# Altium PCB PCB1.PcbDoc
Units mm, origin at the board's own origin, x right, y up, seen from the top; angles counter-clockwise.
Board outline 116.2 x 78.99 mm, 2 copper layers (Top Layer, Bottom Layer); 25 components, 23 nets, 119 pads, 24 vias.
Unrouted connection lines stored in the file: 1.
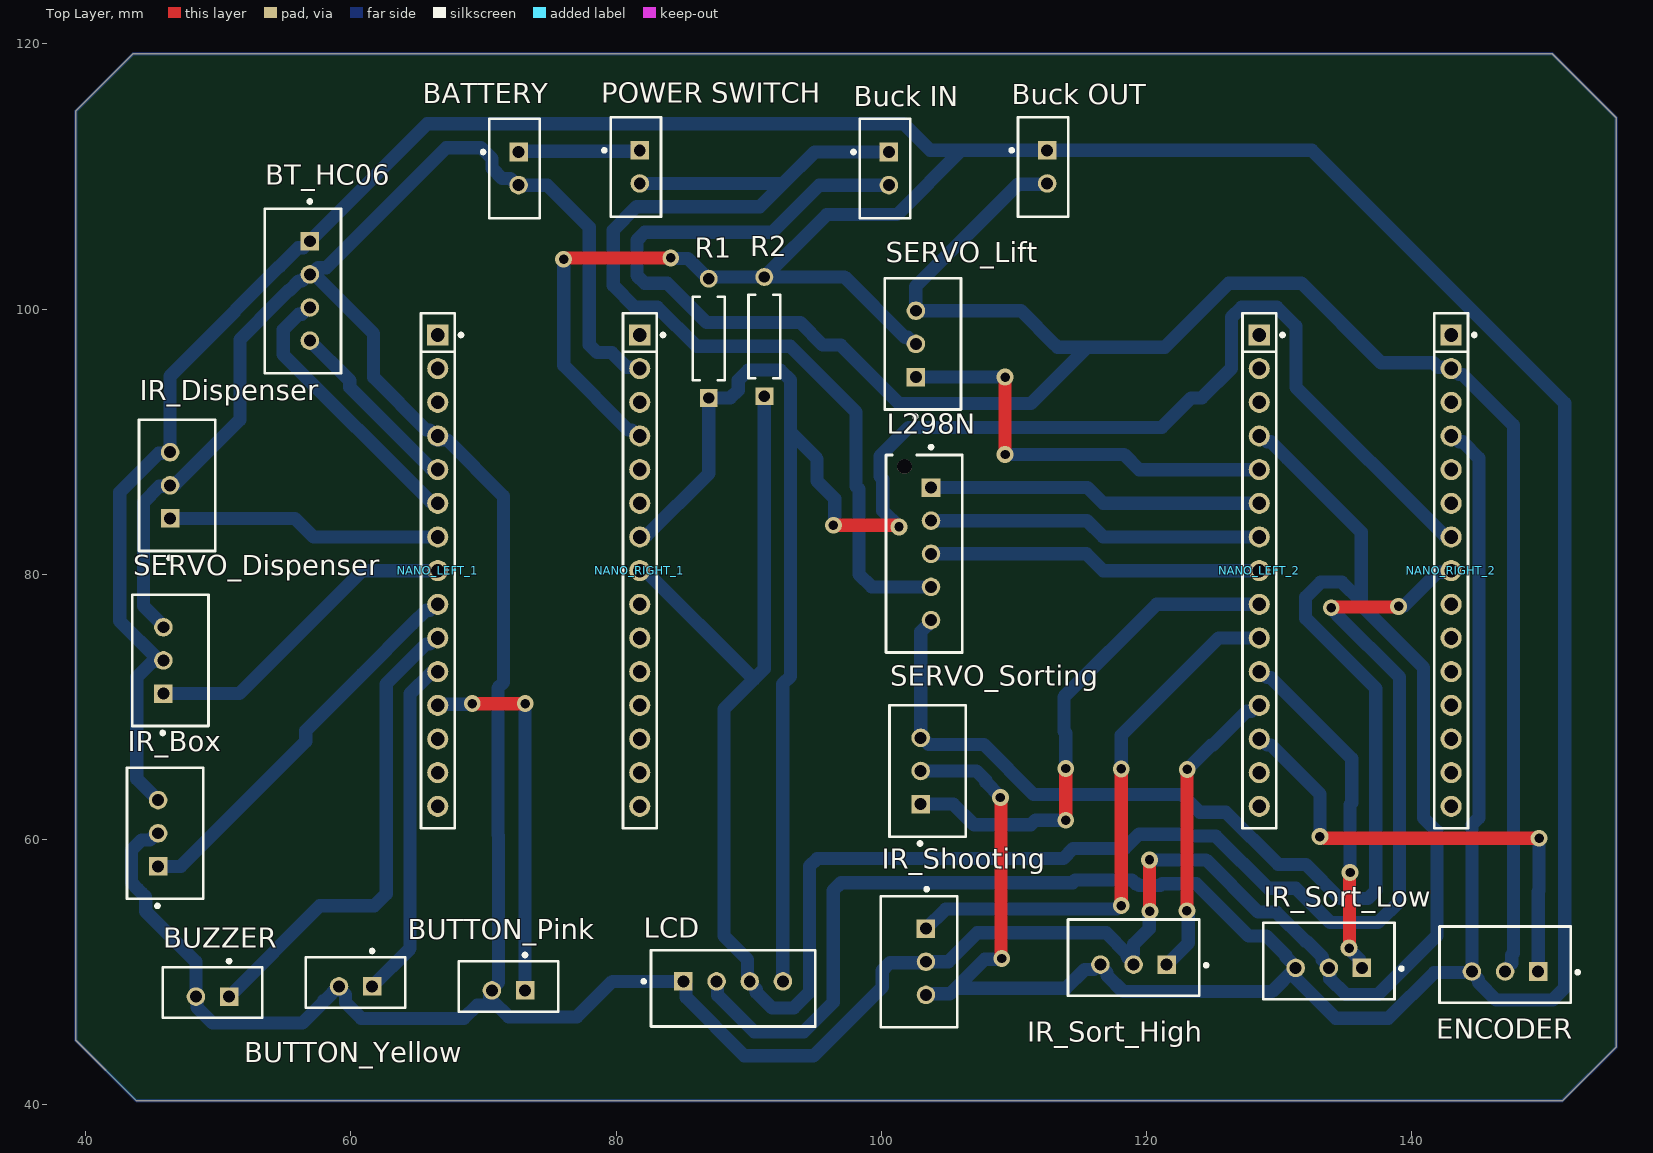
[diagram p0: Top Layer view]
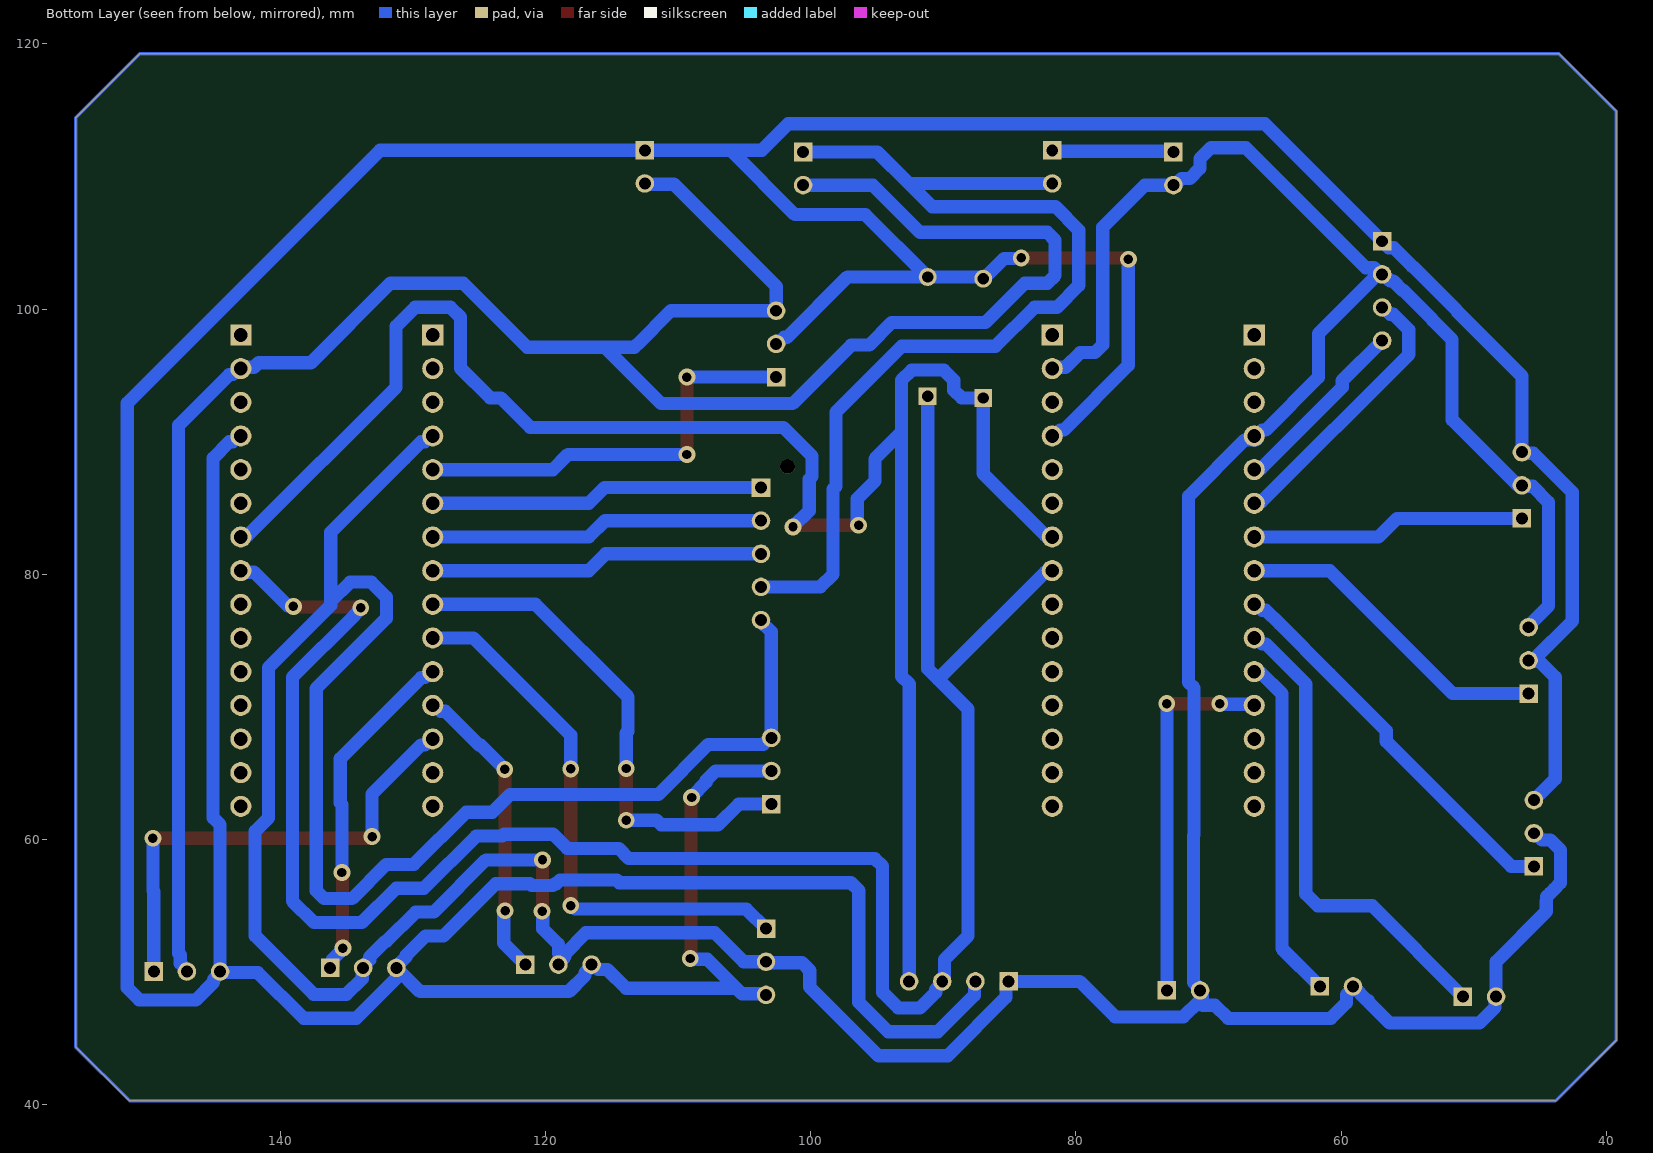
[diagram p1: Bottom Layer view, seen from below]
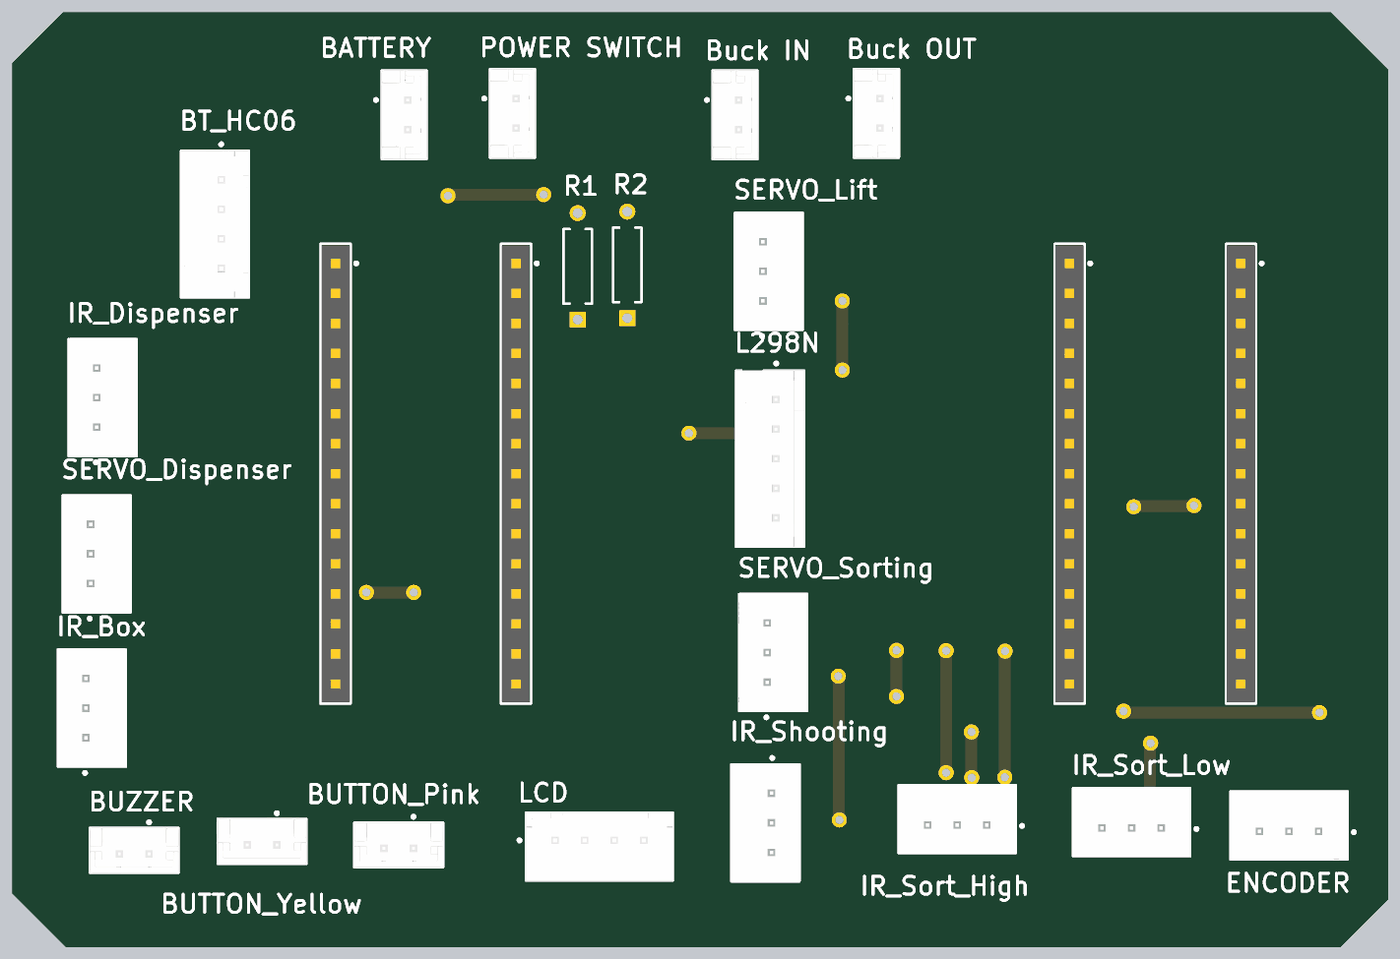
[diagram p2: 3D render of the assembled board from above, using the file's embedded part models]

## Layer stack, top to bottom
Top Solder: solder mask 0.0102, Solder Resist, Dk 3.5
Top Layer: signal copper 0.0356
Dielectric 1: dielectric 0.32, FR-4, Dk 4.8
Bottom Layer: signal copper 0.0356
Bottom Solder: solder mask 0.0102, Solder Resist, Dk 3.5

## Board outline
39.243,44.831 39.243,114.935 43.561,119.253 150.622,119.253 155.448,114.427 155.448,44.323 151.384,40.259 43.815,40.259

## Design rules (kind name [scope] priority, off if disabled: settings)
Clearance [All] p1: gap=0.8 ignorepadtopadclearanceinfootprint=FALSE
PolygonConnect [All] p1: connectstyle=Relief reliefconductorwidth=0.254 reliefentries=4 polygonreliefangle="90 Angle" airgapwidth=0.254
RoutingVias [All] p1: holewidth=0.711 width=1.27 viastyle="Through Hole" minholewidth=0.711 minwidth=1.27 maxholewidth=0.711 maxwidth=1.27
SolderMaskExpansion [All] p1: expansion=0 istentingtop=FALSE
SupplyNets "Schematic Supply Nets_3" [InNet('+5V')] p1: voltage=0.000
SupplyNets "Schematic Supply Nets_1" [InNet('+12V')] p2: voltage=0.000
SupplyNets "Schematic Supply Nets" [InNet('GND')] p3: voltage=0.000
Width [All] p1: maxlimit=1.2 minlimit=0.254 preferedwidth=1 minimp=50.000000 maximp=50.000000 favimp=50.000000
30 further rules are at their usual default settings.

## Components (designator, comment, footprint, x,y, rotation, side; value= is the part's Value field where it differs from the comment)
BATTERY "B2B-EH-A(LF)(SN)" FP-B2B-EH-A_LF_SN-MFG 72.344,110.597 r270 top
BT_HC06 "B4B-XH-A(LF)(SN)" FP-B4B-XH-A_LF_SN-MFG 56.371,101.366 r90 top
"Buck IN" "B2B-EH-A(LF)(SN)" FP-B2B-EH-A_LF_SN-MFG 100.284,110.597 r270 top
"Buck OUT" "B2B-EH-A(LF)(SN)" FP-B2B-EH-A_LF_SN-MFG 112.222,110.724 r270 top
BUTTON_Pink "B2B-EH-A(LF)(SN)" FP-B2B-EH-A_LF_SN-MFG 71.882,48.895 r180 top
BUTTON_Yellow "B2B-EH-A(LF)(SN)" FP-B2B-EH-A_LF_SN-MFG 60.345,49.195 r180 top
BUZZER "B2B-EH-A(LF)(SN)" FP-B2B-EH-A_LF_SN-MFG 49.55,48.433 r180 top
ENCODER "B3B-XH-A(LF)(SN)" FP-B3B-XH-A_LF_SN-MFG 147.066,50.546 r180 top
IR_Box "B3B-XH-A(LF)(SN)" FP-B3B-XH-A_LF_SN-MFG 45.974,60.452 r90 top
IR_Dispenser "B3B-XH-A(LF)(SN)" FP-B3B-XH-A_LF_SN-MFG 46.88,86.701 r90 top
IR_Shooting "B3B-XH-A(LF)(SN)" FP-B3B-XH-A_LF_SN-MFG 102.853,50.76 r270 top
IR_Sort_High "B3B-XH-A(LF)(SN)" FP-B3B-XH-A_LF_SN-MFG 119.039,51.071 r180 top
IR_Sort_Low "B3B-XH-A(LF)(SN)" FP-B3B-XH-A_LF_SN-MFG 133.771,50.817 r180 top
L298N "B5B-XH-AM(LF)(SN)" FP-B5B-XH-AM_LF_SN-MFG 103.234,81.534 r90 top
LCD "B4B-XH-A(LF)(SN)" FP-B4B-XH-A_LF_SN-MFG 88.833,48.751 r180 top
NANO_LEFT_1 "SSW-115-01-T-S" FP-SSW-115-01-T-S-MFG 66.548,80.264 r270 top
NANO_LEFT_2 "SSW-115-01-T-S" FP-SSW-115-01-T-S-MFG 128.524,80.264 r270 top
NANO_RIGHT_1 "SSW-115-01-T-S" FP-SSW-115-01-T-S-MFG 81.788,80.264 r270 top
NANO_RIGHT_2 "SSW-115-01-T-S" FP-SSW-115-01-T-S-MFG 143.002,80.264 r270 top
"POWER SWITCH" "B2B-EH-A(LF)(SN)" FP-B2B-EH-A_LF_SN-MFG 81.488,110.724 r270 top
R1 "MFR-25FBF52-4K75" RESA60-630X240 86.995,97.79 r90 top value=4.7k
R2 "MFR-25FBF52-4K75" RESA60-630X240 91.186,97.917 r90 top value=4.7k
SERVO_Dispenser "B3B-XH-A(LF)(SN)" FP-B3B-XH-A_LF_SN-MFG 46.372,73.493 r90 top
SERVO_Lift "B3B-XH-A(LF)(SN)" FP-B3B-XH-A_LF_SN-MFG 103.141,97.369 r90 top
SERVO_Sorting "B3B-XH-A(LF)(SN)" FP-B3B-XH-A_LF_SN-MFG 103.505,65.151 r90 top

## Footprints (in the part's own frame and the unit in brackets; to place one, negate y for a bottom-side part, rotate by r counter-clockwise, add the part's x,y. Pads: shape width x height; smd on the part's side, far side on the other; paste and mask are expansions set on the pad)
FP-B2B-EH-A_LF_SN-MFG [mm]
  rect 1.4x1.4 hole 0.9 paste-2539.97 mask+0: 1(-1.25,0.3)
  round 1.4 hole 0.9 paste-2539.97 mask+0: 2(1.25,0.3)
  silkscreen extent -3.75,-2.5 3.75,1.9, body extent -3.85,-2 3.85,2, height 0.25
FP-B3B-XH-A_LF_SN-MFG [mm]
  rect 1.4x1.4 hole 0.9 paste-2539.97 mask+0: 1(-2.5,0.525)
  round 1.4 hole 0.9 paste-2539.97 mask+0: 2(0,0.525) 3(2.5,0.525)
  silkscreen extent -5.6,-2.88 4.95,2.88, body extent -5.05,-2.98 5.05,2.98, height 0.25
FP-B4B-XH-A_LF_SN-MFG [mm]
  rect 1.4x1.4 hole 0.9 paste-2539.97 mask+0: 1(3.75,-0.525)
  round 1.4 hole 0.9 paste-2539.97 mask+0: 2(1.25,-0.525) 3(-1.25,-0.525) 4(-3.75,-0.525)
  silkscreen extent -6.2,-2.88 6.87,2.88, body extent -6.3,-2.98 6.3,2.98, height 0.25
FP-B5B-XH-AM_LF_SN-MFG [mm]
  rect 1.4x1.4 hole 0.9 paste-2539.97 mask+0: 1(5,-0.525)
  round 1.4 hole 0.9 paste-2539.97 mask+0: 2(2.5,-0.525) 3(0,-0.525) 4(-2.5,-0.525) 5(-5,-0.525)
  round 1.1 hole 1.1 unplated paste-2539.97 mask+0: ""(6.6,1.475)
  silkscreen extent -7.45,-2.88 8.17,2.88, body extent -7.55,-2.98 7.55,2.98, height 0.25
FP-SSW-115-01-T-S-MFG [mm]
  rect 1.59x1.59 hole 1.04 paste-2539.97 mask+0: 1(-17.78,0)
  round 1.59 hole 1.04 paste-2539.97 mask+0: 2(-15.24,0) 3(-12.7,0) 4(-10.16,0) 5(-7.62,0) 6(-5.08,0) 7(-2.54,0) 8(0,0) 9(2.54,0) 10(5.08,0) 11(7.62,0) 12(10.16,0) 13(12.7,0) 14(15.24,0) 15(17.78,0)
  silkscreen extent -19.43,-1.27 19.43,1.88, body extent -19.3,-1.21 19.3,1.21, height 8.64
RESA60-630X240 [mm] "Axial Resistor, 2-Leads, Dia 2.4mm, Body Length 6.3mm"
  rect 1.35x1.35 hole 0.85: 1(-4.5,0)
  round 1.35 hole 0.85: 2(4.5,0)
  silkscreen extent -3.15,-1.2 3.15,1.2, body extent -4.77,-1.19 4.77,1.2, height 2.4

## Part data
BATTERY "Buck IN" "Buck OUT" BUTTON_Pink BUTTON_Yellow BUZZER "POWER SWITCH": library part CMP-17439-000026-1, "CONN HEADER VERT 2POS 2.5MM", Color=Natural, Contact Resistance=20mR, Current Rating=3A, Housing Color=White, Max Operating Temperature=85°C, Max Voltage Rating (AC)=250V, Min Operating Temperature=-25°C, Connector Type=Plug, Contact Material="Copper Alloy", Contact Mating Length=0.13inch, Contact Plating=Tin, Contact Type="Male Pin", Depth=3.8mm, Fastening Type=Detent, Gender=Male, Housing Material=Nylon, Lead Free="Lead Free", Length=7.5mm, Max Current Rating=3A, Mount="Through Hole", Number of Contacts=2, Number of Positions=2, Number of Rows=1, Orientation=Straight, Packaging=Bulk, Pitch=2.5mm, Series=EH, Termination=Press-Fit, Voltage Rating=250V
BT_HC06 LCD: library part CMP-17439-000250-1, "CONN HEADER VERT 4POS 2.5MM", Color=Natural, Contact Resistance=20mR, Current Rating=3A, Flammability Rating="UL94 V-0", Housing Color=White, Insulation Resistance=1GR, Max Operating Temperature=85°C, Max Voltage Rating (AC)=250V, Min Operating Temperature=-25°C, Package Quantity=500, Connector Type=Header, Contact Finish - Mating=TIN, Contact Material=Brass, Contact Plating=Tin, Contact Shape=Square, Contact Type="Male Pin", Depth=5.75mm, Fastening Type=Detent, Gender=Male, Housing Material=Polyamide, Insulation Color=Natural, Insulation Material=Nylon, Lead Free="Lead Free", Lead Pitch=2.5mm, Length=12.4mm, Mated Stacking Heights=9.8mm, Material=Polyamide, Max Current Rating=3A, Max Voltage Rating (DC)=250V, Mount="Through Hole", Number of Contacts=4, Number of Positions=4, Number of Rows=1, Orientation=Straight, Packaging=Bulk, Pitch=2.5mm, REACH SVHC="No SVHC", Series=XH, Termination=Solder, Voltage Rating=250V, Voltage Rating (AC)=250V, Wire/Cable Gauge=22AWG
ENCODER IR_Box IR_Dispenser IR_Shooting IR_Sort_High IR_Sort_Low SERVO_Dispenser SERVO_Lift SERVO_Sorting: library part CMP-17439-000014-3, "CONN HEADER VERT 3POS 2.5MM", Color=Natural, Contact Resistance=20mR, Current Rating=3A, Flammability Rating="UL94 V-0", Housing Color=White, Insulation Resistance=1GR, Max Operating Temperature=85°C, Max Voltage Rating (AC)=250V, Min Operating Temperature=-25°C, Connector Type=Header, Contact Finish - Mating=TIN, Contact Material=Brass, Contact Plating=Tin, Contact Shape=Square, Contact Type="Male Pin", Depth=5.75mm, Fastening Type=Detent, Gender=Male, Housing Material=Polyamide, Insulation Color=Natural, Insulation Material=Nylon, Lead Free="Lead Free", Lead Pitch=2.5mm, Length=9.9mm, Max Current Rating=3A, Max Voltage Rating (DC)=250V, Mount="Through Hole", Number of Contacts=3, Number of Positions=3, Number of Rows=1, Orientation=Straight, Packaging=Bulk, Pitch=2.5mm, REACH SVHC="No SVHC", Series=XH, Termination=Solder, Voltage Rating=250V, Voltage Rating (AC)=250V, Wire/Cable Gauge=22AWG
L298N: library part CMP-17439-000304-1, "CONN HEADER VERT 5POS 2.5MM", Color=Green, Contact Resistance=20mR, Flammability Rating="UL94 V-0", Housing Color=White, Insulation Color=Natural, Max Current Rating=3A, Max Operating Temperature=85°C, Max Voltage Rating (AC)=250V, Min Operating Temperature=-25°C, Connector Type=Header, Contact Finish - Mating=TIN, Contact Material=Brass, Contact Plating=Copper, Contact Shape=Square, Contact Type="Male Pin", Depth=5.75mm, Fastening Type=Detent, Housing Material=Polyamide, Insulation Material=Nylon, Lead Free="Lead Free", Length=14.9mm, Mated Stacking Heights=9.8mm, Mount="Through Hole", Number of Positions=5, Number of Rows=1, Orientation=Straight, Packaging=Bulk, Pitch=2.5mm, Series=XH, Termination=Solder, Voltage Rating=250V
NANO_LEFT_1 NANO_LEFT_2 NANO_RIGHT_1 NANO_RIGHT_2: library part CMP-02766-001723-1, "CONN RCPT 15POS 0.1 TIN PCB", Color=Black, Contact Resistance=10mR, Max Current Rating=6.9A, Max Operating Temperature=105°C, Max Voltage Rating (AC)=550V, Min Operating Temperature=-55°C, Connector Type=Receptacle, Contact Material=Bronze, Contact Plating=Tin, Contact Type="Female Socket", Depth=2.41mm, Gender=Receptacle, Housing Color=Black, Housing Material=Polymer, Lead Free="Lead Free", Length=38.61mm, Mating Cycles=100, Mount="Through Hole", Number of Contacts=15, Number of Positions=15, Number of Rows=1, Orientation=Straight, Packaging=Bulk, Pitch=0.1inch, Radiation Hardening=No, REACH SVHC="No SVHC", RoHS Compliant=Yes, Series=SSW, Termination=Solder, Width=2.41mm
R1 R2: library part CMP-009-00059-4, "Axial Resistor, 4.75 KOhm, +/- 1%, 0.25 W, -55 to 155 degC, 2-Pin THD, RoHS, Bulk", Case/Package=Axial, Manufacturer=Yageo, Max Operating Temperature=155°C, Min Operating Temperature=-55°C, Package Description="2-Pin Axial Lead, Dia 2.4 mm, Body Length 6.3 mm", Package Quantity=200, Package Reference=MFR-25, Power=250mW, Tolerance=1%, Voltage Rating=250V, Composition=MetalFilm, Datasheet URL=http://www.yageo.com/documents/recent/Yageo%20LR_MFR_2013.pdf, Datasheet Version=Apr-13, Manufacturer URL=http://www.yageo.com/, Mounting Technology=TH, Packaging=Bulk, RoHS Compliant=True

## Via types
v1: diameter 1.27, hole 0.711, Top Layer to Bottom Layer, 24 vias

## Nets (pads, with @x,y where several pads share a name; then routed paths per layer and width w, separated by ;. In a path a pad name is that pad's centre, name@x,y a point inside that pad or via, vN(x,y) a via of type N, cw(c..) or ccw(c..) an arc to the next point about the centre after c; other vN are vias at no path point)
+5V: "Buck OUT.1" BT_HC06.1 ENCODER.3 IR_Box.3 IR_Dispenser.3 IR_Shooting.3 IR_Sort_High.3 IR_Sort_Low.3 LCD.2 NANO_RIGHT_1.4 NANO_RIGHT_2.4 R1.2 R2.2 SERVO_Dispenser.2 SERVO_Lift.2 SERVO_Sorting.2 | length 446.1
  Top Layer w1: v1(76.043,103.759) 76.133,103.759 76.23,103.856 v1(84.13,103.856) ; v1(108.998,63.151) 109.045,63.103 109.045,51.05 v1(109.093,51.002)
  Bottom Layer w1: IR_Box.3 43.847,64.554 43.847,72.231 45.032,73.416 45.77,73.416 SERVO_Dispenser.2 45.77,73.57 45.442,73.57 42.555,76.457 42.555,86.185 45.494,89.124 46.278,89.124 IR_Dispenser.3 46.355,94.949 51.296,99.89 51.296,99.936 54.576,103.216 54.622,103.216 56.022,104.616 56.396,104.616 BT_HC06.1 65.754,113.974 101.695,113.974 103.695,111.974 106.039,111.974 ; v1(76.043,103.759) 76.043,95.746 80.92,90.869 81.183,90.869 81.628,90.424 NANO_RIGHT_1.4 ; v1(84.13,103.856) 84.182,103.804 85.433,103.804 86.948,102.29 R1.2 87.09,102.29 87.217,102.417 R2.2 ; LCD.2 87.66,49.199 87.66,48.24 90.423,45.476 94.157,45.476 96.383,47.702 96.383,56.139 96.969,56.725 114.443,56.725 114.644,56.926 118.912,56.926 119.196,56.642 119.308,56.642 119.443,56.507 121.046,56.507 121.181,56.642 123.766,56.642 127.705,52.704 129.065,52.704 130.525,51.243 130.525,51.146 131.348,50.324 IR_Sort_Low.3@131.348,50.292 ; SERVO_Lift.2 102.508,97.369 102.008,97.869 101.788,97.869 97.24,102.417 R2.2 ; SERVO_Sorting.2 107.188,65.151 107.895,64.444 107.895,64.326 108.998,63.224 v1(108.998,63.151) ; IR_Shooting.3 103.455,48.337 105.198,48.337 107.812,50.95 109.041,50.95 v1(109.093,51.002) ; 105.822,48.76 113.934,48.76 115.339,50.165 116.05,50.165 116.354,50.469 IR_Sort_High.3@116.507,50.469 ; IR_Sort_High.3 116.647,50.546 116.616,50.514 116.616,50.361 117.039,49.938 117.039,49.718 118.243,48.514 129.493,48.514 IR_Sort_Low.3 ; 131.348,49.431 134.287,46.492 138.255,46.492 141.708,49.944 144.489,49.944 ENCODER.3 144.566,61.085 145.097,61.616 145.097,88.752 143.87,89.979 143.607,89.979 143.162,90.424 NANO_RIGHT_2.4 ; ENCODER.3@144.643,49.913 144.643,49.836 145.066,49.413 145.066,49.193 146.38,47.879 150.662,47.879 151.571,48.788 151.571,92.903 132.5,111.974 112.522,111.974 106.039,111.974 ; R2.2 95.898,107.129 101.194,107.129 106.039,111.974
+12V: "Buck IN.1" "POWER SWITCH.2" L298N.4 | length 78.7
  Bottom Layer w1: 81.788,109.474 92.599,109.474 ; 100.584,111.847 94.972,111.847 92.599,109.474 ; L298N.4 99.284,79.034 98.32,79.998 98.32,82.883 98.328,82.891 98.328,84.495 98.32,84.503 98.32,86.411 98.109,86.622 98.109,92.228 93.145,97.192 86.068,97.192 83.121,100.139 81.418,100.139 79.778,101.779 79.778,105.951 81.54,107.712 90.838,107.712 92.599,109.474
GND: "Buck IN.2" "Buck OUT.2" BATTERY.2 BT_HC06.2 BUTTON_Pink.2 BUTTON_Yellow.2 BUZZER.2 ENCODER.2 IR_Box.2 IR_Dispenser.2 IR_Shooting.2 IR_Sort_High.2 IR_Sort_Low.2 L298N.5 LCD.1 NANO_LEFT_1.4 NANO_LEFT_2.4 NANO_RIGHT_1.2 NANO_RIGHT_2.2 SERVO_Dispenser.3 SERVO_Lift.3 SERVO_Sorting.3 | length 566.8
  Top Layer w1: v1(120.244,58.442) 120.244,54.597 v1(120.269,54.572)
  Bottom Layer w1: 44.225,55.937 43.923,56.24 43.449,56.714 43.449,59.19 44.211,59.952 44.841,59.952 45.341,60.452 IR_Box.2 ; 44.226,55.937 44.504,55.658 44.518,55.265 cw(c43.519,55.23) 44.518,55.203 cw(c21.881,55.879) 44.511,54.983 44.511,54.964 44.511,54.549 48.3,50.76 BUZZER.2 48.377,48.056 48.377,47.318 49.562,46.133 56.233,46.133 ; SERVO_Dispenser.3 45.847,76.101 44.355,77.593 44.355,85.439 45.54,86.624 46.278,86.624 IR_Dispenser.2 46.432,86.778 46.76,86.778 51.625,91.643 51.625,97.674 53.096,99.144 53.096,99.19 55.322,101.416 55.368,101.416 56.068,102.116 56.288,102.116 56.788,102.616 BT_HC06.2 ; 56.333,46.133 57.928,47.728 57.928,47.828 ; 58.028,47.828 BUTTON_Yellow.2 59.095,48.787 59.595,48.287 59.595,47.657 60.77,46.482 68.519,46.482 69.518,47.481 70.443,47.481 70.443,47.78 70.443,48.406 70.61,48.573 BUTTON_Pink.2 70.632,48.703 71.132,49.203 71.132,60.287 71.09,60.329 71.09,71.414 71.501,71.825 71.501,85.894 67.266,90.129 NANO_LEFT_1.4@66.426,90.129 ; NANO_LEFT_1.4@66.253,90.559 65.943,90.869 65.68,90.869 61.702,94.847 61.702,98.138 57.301,102.539 56.973,102.539 BT_HC06.2 ; NANO_LEFT_1.4@66.388,90.424 NANO_LEFT_1.4 ; 70.709,47.78 71.894,46.595 77.048,46.595 79.729,49.276 LCD.1 85.283,49.076 85.283,48.071 89.678,43.676 94.903,43.676 100.076,48.849 100.076,50.098 100.662,50.683 103.301,50.683 IR_Shooting.2 105.076,50.76 107.253,52.937 116.976,52.937 118.539,51.374 118.539,51.154 119.039,50.654 IR_Sort_High.2 ; NANO_RIGHT_1.2 81.675,95.617 80.787,95.617 79.689,96.715 78.564,96.715 77.978,97.301 77.978,106.172 74.803,109.347 72.536,109.347 72.036,109.847 71.406,109.847 70.644,110.609 70.644,111.347 69.817,112.174 67.192,112.174 58.134,103.116 57.504,103.116 57.004,102.616 BT_HC06.2 ; 100.584,109.347 95.323,109.347 91.767,105.791 82.164,105.791 81.578,105.205 81.578,102.525 82.164,101.939 83.867,101.939 86.814,98.992 93.891,98.992 95.601,97.282 96.965,97.282 101.378,92.869 111.296,92.869 115.552,97.125 ; L298N.5 103.759,76.426 102.98,75.647 SERVO_Sorting.3 103.088,67.651 103.588,67.151 107.734,67.151 111.512,63.373 122.699,63.373 124.03,62.042 126.003,62.042 129.941,58.104 132.023,58.104 134.606,55.521 136.721,55.521 137.307,56.107 137.307,71.381 132.02,76.668 132.02,78.272 133.153,79.405 134.756,79.405 136.209,77.953 ; 112.522,109.474 112.459,109.411 110.322,109.411 102.616,101.705 SERVO_Lift.3 110.556,99.869 113.103,97.322 ; 113.3,97.125 115.552,97.125 ; 119.039,51.374 119.039,52.076 120.217,53.254 120.217,54.52 v1(120.269,54.572) ; v1(120.244,58.442) 124.512,58.442 128.45,54.504 129.811,54.504 132.022,52.292 132.099,52.292 133.271,51.12 133.271,50.9 133.848,50.324 133.848,49.477 135.033,48.292 137.509,48.292 141.925,52.708 141.925,60.598 140.907,61.616 140.907,66.696 140.907,72.964 136.209,77.662 136.209,77.953 ; NANO_LEFT_2.4 128.684,90.424 129.129,89.979 129.392,89.979 130.619,88.752 136.138,83.233 136.209,83.162 136.209,77.953 ; NANO_RIGHT_2.2 142.889,95.617 141.999,95.617 141.667,95.949 137.707,95.949 131.717,101.939 126.214,101.939 121.4,97.125 115.552,97.125 ; NANO_RIGHT_2.2@143.162,95.391 143.275,95.391 143.607,95.059 143.87,95.059 147.701,91.228 147.701,51.394 147.566,51.259 147.566,50.629 147.066,50.129 ENCODER.2
NetBATTERY_1: "POWER SWITCH.1" BATTERY.1 | length 9.2
  Bottom Layer w1: BATTERY.1 72.707,111.911 81.724,111.911 81.788,111.974
NetBT_HC06_3: BT_HC06.3 NANO_LEFT_1.6 | length 20.9
  Bottom Layer w1: BT_HC06.3 56.788,100.116 56.288,99.616 56.068,99.616 54.896,98.444 54.896,96.562 66.001,85.457 66.435,85.457 NANO_LEFT_1.6
NetBT_HC06_4: BT_HC06.4 NANO_LEFT_1.5 | length 14
  Bottom Layer w1: BT_HC06.4 59.902,94.61 59.902,94.101 66.007,87.997 66.435,87.997 NANO_LEFT_1.5
NetBUTTON_Pink_1: BUTTON_Pink.1 NANO_LEFT_1.12 | length 28.3
  Top Layer w1: v1(69.155,70.231) v1(73.152,70.231)
  Bottom Layer w1: NANO_LEFT_1.12 66.623,70.179 69.103,70.179 v1(69.155,70.231) ; BUTTON_Pink.1 73.132,70.211 v1(73.152,70.231)
NetBUTTON_Yellow_1: BUTTON_Yellow.1 NANO_LEFT_1.11 | length 26
  Bottom Layer w1: BUTTON_Yellow.1 64.453,51.753 64.453,70.972 66.012,72.531 66.435,72.531 NANO_LEFT_1.11
NetBUZZER_1: BUZZER.1 NANO_LEFT_1.10 | length 36.2
  Bottom Layer w1: BUZZER.1 57.642,54.975 61.749,54.975 62.653,55.878 62.653,71.717 65.267,74.331 65.272,74.331 65.68,74.739 65.943,74.739 66.388,75.184 NANO_LEFT_1.10
NetENCODER_1: ENCODER.1 NANO_LEFT_2.13 | length 36.2
  Top Layer w1: v1(133.096,60.198) 133.148,60.146 133.339,60.146 133.414,60.071 v1(149.636,60.071)
  Bottom Layer w1: NANO_LEFT_2.13 128.684,67.564 129.129,67.119 129.392,67.119 133.096,63.415 v1(133.096,60.198) ; ENCODER.1 149.566,56.039 149.636,56.109 v1(149.636,60.071)
NetIR_Box_1: IR_Box.1 NANO_LEFT_1.9 | length 29.8
  Bottom Layer w1: IR_Box.1 47.157,57.952 56.585,67.38 56.585,68.183 60.853,72.452 60.853,72.463 64.634,76.244 64.64,76.244 65.675,77.279 65.943,77.279 66.388,77.724 NANO_LEFT_1.9
NetIR_Dispenser_1: IR_Dispenser.1 NANO_LEFT_1.7 | length 20.8
  Bottom Layer w1: IR_Dispenser.1 55.773,84.201 57.17,82.804 NANO_LEFT_1.7
NetIR_Shooting_1: IR_Shooting.1 NANO_LEFT_2.10 | length 41.8
  Top Layer w1: v1(118.11,54.991) v1(118.11,65.308)
  Bottom Layer w1: IR_Shooting.1 104.855,54.737 117.783,54.737 118.037,54.991 v1(118.11,54.991) ; v1(118.11,65.308) 118.11,67.843 125.451,75.184 NANO_LEFT_2.10
NetIR_Sort_High_1: IR_Sort_High.1 NANO_LEFT_2.12 | length 22.9
  Top Layer w1: v1(123.062,54.609) 123.062,65.244 v1(123.087,65.269)
  Bottom Layer w1: IR_Sort_High.1 123.158,52.165 123.158,54.514 v1(123.062,54.609) ; v1(123.087,65.269) 124.904,67.085 124.997,67.085 127.571,69.659 127.919,69.659 128.364,70.104 NANO_LEFT_2.12
NetIR_Sort_Low_1: IR_Sort_Low.1 NANO_LEFT_2.11 | length 26
  Top Layer w1: v1(135.296,51.786) 135.334,51.824 135.334,57.453 v1(135.372,57.491)
  Bottom Layer w1: NANO_LEFT_2.11 128.684,72.644 129.129,72.199 129.392,72.199 135.507,66.084 135.507,62.748 135.372,62.613 v1(135.372,57.491) ; v1(135.296,51.786) 135.296,51.713 136.071,50.938 136.071,50.492 IR_Sort_Low.1
NetL298N_1: L298N.1 NANO_LEFT_2.6 | length 25.3
  Bottom Layer w1: L298N.1 115.572,86.534 116.762,85.344 NANO_LEFT_2.6
NetL298N_2: L298N.2 NANO_LEFT_2.7 | length 25.3
  Bottom Layer w1: L298N.2 115.526,84.034 116.756,82.804 NANO_LEFT_2.7
NetL298N_3: L298N.3 NANO_LEFT_2.8 | length 25.3
  Bottom Layer w1: L298N.3 115.481,81.534 116.751,80.264 NANO_LEFT_2.8
NetLCD_3: LCD.3 NANO_RIGHT_1.8 NANO_RIGHT_2.8 R2.1 | length 156.5
  Top Layer w1: v1(133.955,77.47) 134.005,77.52 138.988,77.52 v1(139.038,77.57)
  Bottom Layer w1: NANO_RIGHT_1.8 81.901,80.151 82.324,80.151 90.083,72.392 ; LCD.3 90.006,49.353 90.006,49.635 89.916,49.726 89.916,50.927 88.138,52.705 88.138,69.819 90.397,72.078 91.186,72.867 R2.1 ; LCD.3@90.16,49.091 90.583,48.668 90.583,48.448 91.755,47.276 93.411,47.276 94.583,48.448 94.583,57.961 95.169,58.547 113.735,58.547 114.497,59.309 118.375,59.309 119.443,60.377 123.149,60.377 123.284,60.242 125.258,60.242 129.196,56.304 131.277,56.304 133.86,53.721 137.489,53.721 139.107,55.339 139.107,57.674 139.107,72.218 134.409,76.916 134.409,76.943 133.955,77.397 v1(133.955,77.47) ; v1(139.038,77.57) 139.089,77.621 139.47,77.621 142,80.151 142.889,80.151 NANO_RIGHT_2.8
NetLCD_4: LCD.4 NANO_RIGHT_1.7 NANO_RIGHT_2.7 R1.1 | length 145.5
  Top Layer w1: v1(96.393,83.693) 101.219,83.693 v1(101.346,83.566)
  Bottom Layer w1: NANO_RIGHT_1.7 81.901,82.917 82.324,82.917 86.995,87.588 R1.1 88.625,93.29 89.211,93.876 89.211,94.63 89.973,95.392 92.399,95.392 93.161,94.63 93.161,90.689 ; LCD.4 92.583,71.718 93.161,72.296 93.161,90.689 ; v1(96.393,83.693) 96.49,83.79 96.49,85.695 95.161,87.025 95.161,88.689 93.161,90.689 ; v1(101.346,83.566) 100.12,84.792 100.12,87.157 99.909,87.368 99.909,88.9 100.993,89.984 102.078,91.069 121.16,91.069 123.381,93.29 124.181,93.29 126.429,95.538 126.429,99.377 127.191,100.139 129.857,100.139 131.289,98.707 131.289,94.094 142.466,82.917 142.889,82.917 NANO_RIGHT_2.7
NetNANO_LEFT_1_8: NANO_LEFT_1.8 SERVO_Dispenser.1 | length 24.5
  Bottom Layer w1: SERVO_Dispenser.1 51.582,70.993 60.853,80.264 NANO_LEFT_1.8
NetNANO_LEFT_2_5: NANO_LEFT_2.5 SERVO_Lift.1 | length 32.2
  Top Layer w1: v1(109.347,89.027) v1(109.347,94.869)
  Bottom Layer w1: SERVO_Lift.1 v1(109.347,94.869) ; v1(109.347,89.027) 118.321,89.027 119.464,87.884 NANO_LEFT_2.5
NetNANO_LEFT_2_9: NANO_LEFT_2.9 SERVO_Sorting.1 | length 38.7
  Top Layer w1: v1(113.919,61.438) v1(113.919,65.338)
  Bottom Layer w1: SERVO_Sorting.1 105.438,62.651 107.002,61.087 111.284,61.087 111.635,61.438 v1(113.919,61.438) ; v1(113.919,65.338) 113.919,68.012 113.792,68.139 113.792,70.739 120.777,77.724 NANO_LEFT_2.9
pads on no net: L298N. NANO_LEFT_1.1 NANO_LEFT_1.2 NANO_LEFT_1.3 NANO_LEFT_1.13 NANO_LEFT_1.14 NANO_LEFT_1.15 NANO_LEFT_2.1 NANO_LEFT_2.2 NANO_LEFT_2.3 NANO_LEFT_2.14 NANO_LEFT_2.15 NANO_RIGHT_1.1 NANO_RIGHT_1.3 NANO_RIGHT_1.5 NANO_RIGHT_1.6 NANO_RIGHT_1.9 NANO_RIGHT_1.10 NANO_RIGHT_1.11 NANO_RIGHT_1.12 NANO_RIGHT_1.13 NANO_RIGHT_1.14 NANO_RIGHT_1.15 NANO_RIGHT_2.1 NANO_RIGHT_2.3 NANO_RIGHT_2.5 NANO_RIGHT_2.6 NANO_RIGHT_2.9 NANO_RIGHT_2.10 NANO_RIGHT_2.11 NANO_RIGHT_2.12 NANO_RIGHT_2.13 NANO_RIGHT_2.14 NANO_RIGHT_2.15
copper on no net: | length 380
  Bottom Layer w0.254: 39.243,44.831 39.243,114.935 43.561,119.253 150.622,119.253 155.448,114.427 155.448,44.323 151.384,40.259 43.815,40.259 39.243,44.831